# EAGLE board FIFO+Expander-Rev2 (EAGLE 9.6.2)
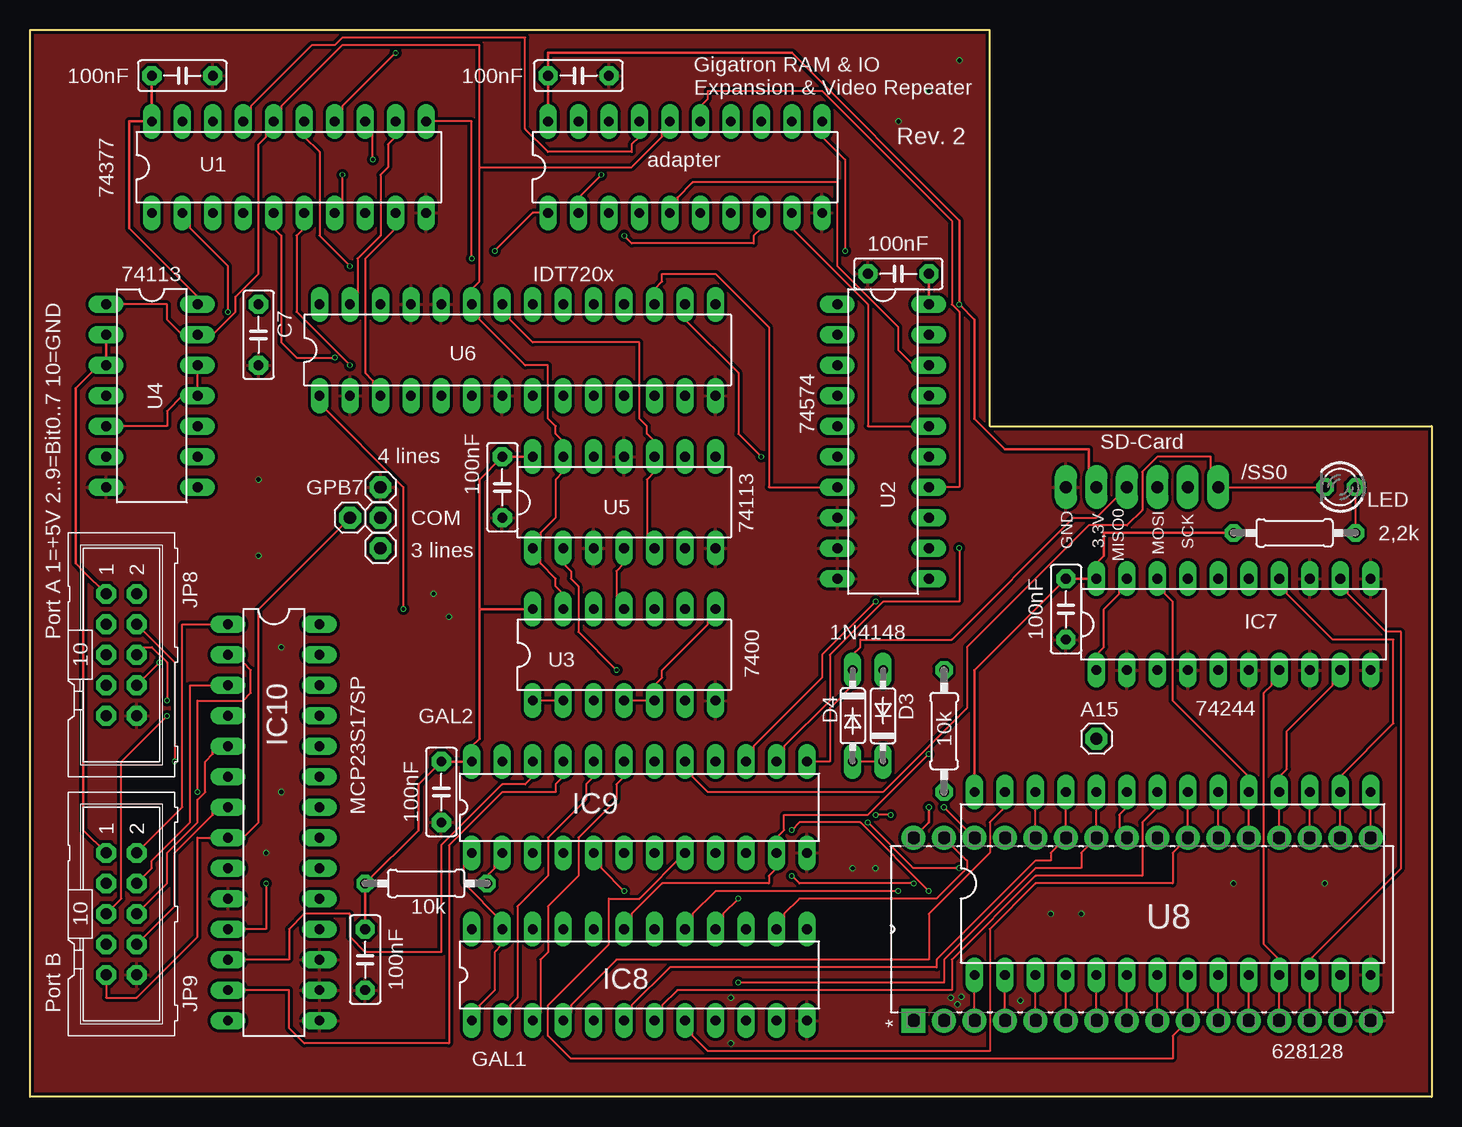
[diagram p0: board, top side]
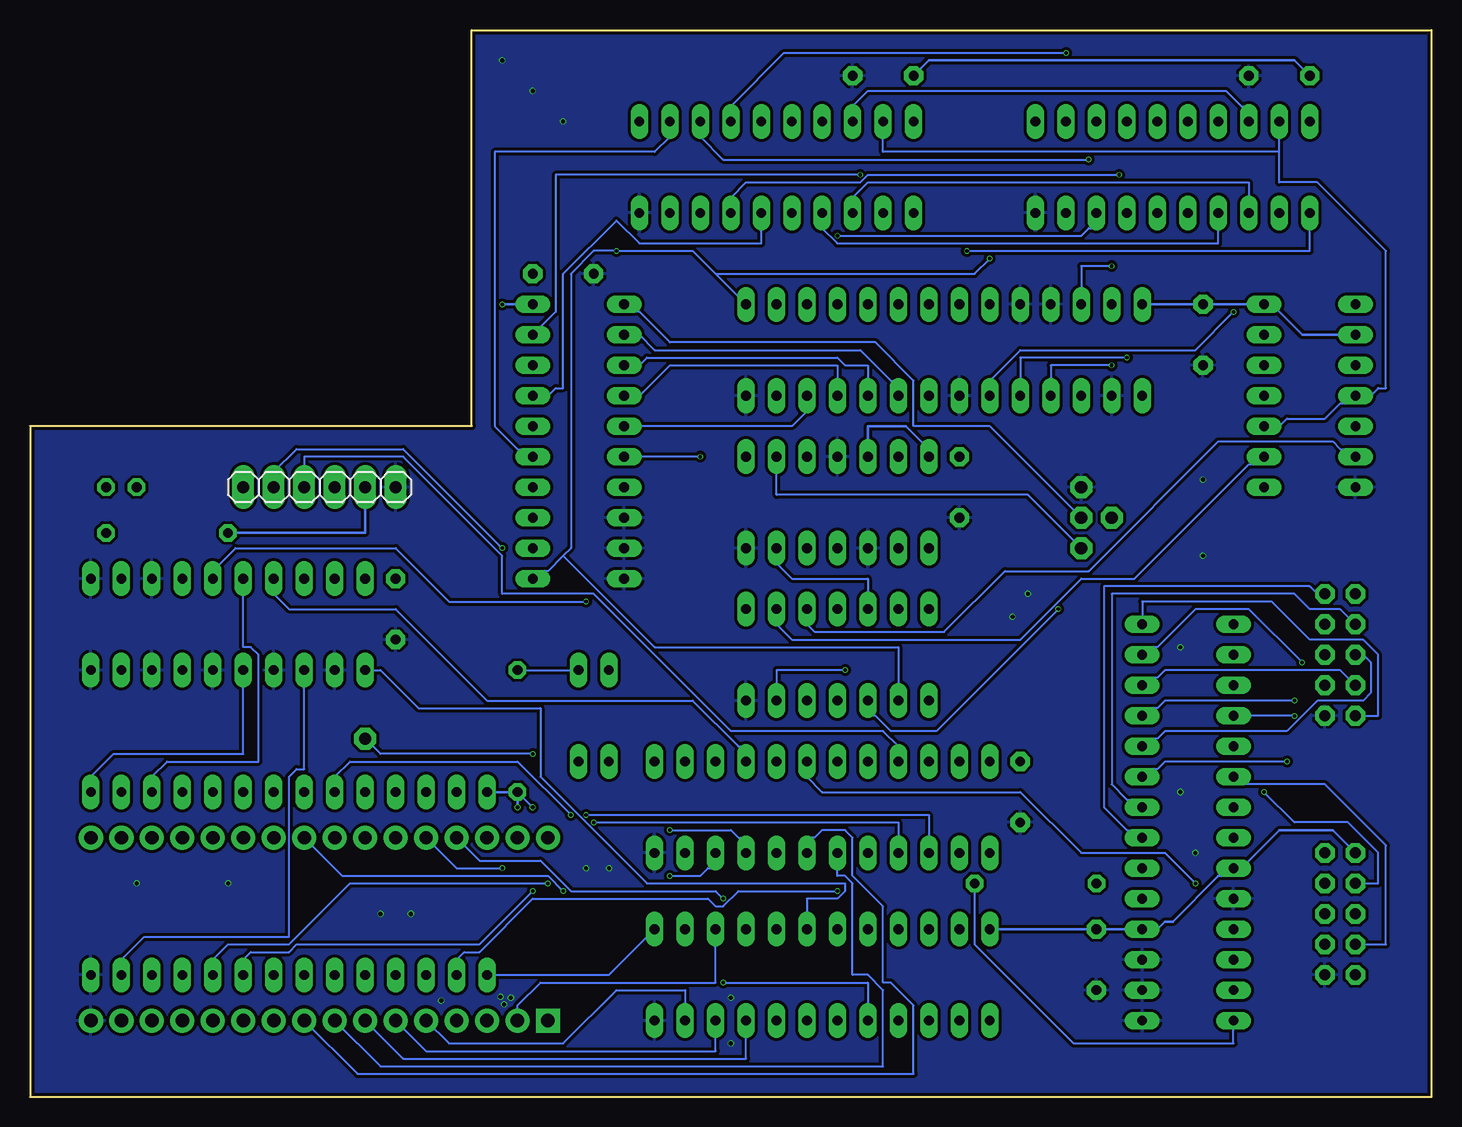
[diagram p1: board, bottom side, seen from below]

Size 116.84 x 88.9 mm. Coordinates in mm from the lower left corner, seen from the top.
Outline: 80.01,55.88 116.84,55.88 116.84,0 0,0 0,88.9 80.01,88.9 80.01,55.88
Copper layers (1*16): Top 0.035mm / dielectric 1.6mm / Bottom 0.035mm
Design rules "jlcpcb-2layers": minimum track width 5mil, minimum drill 0.3mm, track to track 5mil, track to pad 5mil, pad to pad 5mil, via to via 5mil, smd to smd 5mil, copper to edge 0.2mm, drill to drill 6mil, minimum pad ring 10mil, minimum via ring 3mil, stop-mask expansion 4mil, vias tented up to drill 0mil, thermal gap 10mil
Net classes: 0 default: width 0.152 mm, drill 0.127 mm, clearance 0.127 mm; 1 power: width 0.203 mm, drill 0.127 mm, clearance 0.127 mm

## Footprints (pad centres in the part's own frame; a part is rotated, then mirrored left to right if it is on the bottom)
1X01 = drill 1.016 octagon: 1 0,0
C5B2.5 = drill 0.813 pad 1.6 octagon: 1 -2.54,0; 2 2.54,0
DIL20 = drill 0.813 long: 1 -11.43,-3.81; 2 -8.89,-3.81; 3 -6.35,-3.81; 4 -3.81,-3.81; 5 -1.27,-3.81; 6 1.27,-3.81; 7 3.81,-3.81; 8 6.35,-3.81; 9 8.89,-3.81; 10 11.43,-3.81; 11 11.43,3.81; 12 8.89,3.81; 13 6.35,3.81; 14 3.81,3.81; 15 1.27,3.81; 16 -1.27,3.81; 17 -3.81,3.81; 18 -6.35,3.81; 19 -8.89,3.81; 20 -11.43,3.81
DO35-7 = drill 0.813 long: A 3.81,0; C -3.81,0
DIL28-6 = drill 0.813 long: 1 -16.51,-7.62; 2 -13.97,-7.62; 3 -11.43,-7.62; 4 -8.89,-7.62; 5 -6.35,-7.62; 6 -3.81,-7.62; 7 -1.27,-7.62; 8 1.27,-7.62; 9 3.81,-7.62; 10 6.35,-7.62; 11 8.89,-7.62; 12 11.43,-7.62; 13 13.97,-7.62; 14 16.51,-7.62; 15 16.51,7.62; 16 13.97,7.62; 17 11.43,7.62; 18 8.89,7.62; 19 6.35,7.62; 20 3.81,7.62; 21 1.27,7.62; 22 -1.27,7.62; 23 -3.81,7.62; 24 -6.35,7.62; 25 -8.89,7.62; 26 -11.43,7.62; 27 -13.97,7.62; 28 -16.51,7.62
DIL24-3 = drill 0.813 long: 1 -13.97,-3.81; 2 -11.43,-3.81; 3 -8.89,-3.81; 4 -6.35,-3.81; 5 -3.81,-3.81; 6 -1.27,-3.81; 7 1.27,-3.81; 8 3.81,-3.81; 9 6.35,-3.81; 10 8.89,-3.81; 11 11.43,-3.81; 12 13.97,-3.81; 13 13.97,3.81; 14 11.43,3.81; 15 8.89,3.81; 16 6.35,3.81; 17 3.81,3.81; 18 1.27,3.81; 19 -1.27,3.81; 20 -3.81,3.81; 21 -6.35,3.81; 22 -8.89,3.81; 23 -11.43,3.81; 24 -13.97,3.81
DIL28-3 = drill 0.813 long: 1 -16.51,-3.81; 2 -13.97,-3.81; 3 -11.43,-3.81; 4 -8.89,-3.81; 5 -6.35,-3.81; 6 -3.81,-3.81; 7 -1.27,-3.81; 8 1.27,-3.81; 9 3.81,-3.81; 10 6.35,-3.81; 11 8.89,-3.81; 12 11.43,-3.81; 13 13.97,-3.81; 14 16.51,-3.81; 15 16.51,3.81; 16 13.97,3.81; 17 11.43,3.81; 18 8.89,3.81; 19 6.35,3.81; 20 3.81,3.81; 21 1.27,3.81; 22 -1.27,3.81; 23 -3.81,3.81; 24 -6.35,3.81; 25 -8.89,3.81; 26 -11.43,3.81; 27 -13.97,3.81; 28 -16.51,3.81
ML10 = drill 0.914 octagon: 1 -5.08,-1.27; 2 -5.08,1.27; 3 -2.54,-1.27; 4 -2.54,1.27; 5 0,-1.27; 6 0,1.27; 7 2.54,-1.27; 8 2.54,1.27; 9 5.08,-1.27; 10 5.08,1.27
1X06 = drill 1.016 long: 1 -6.35,0; 2 -3.81,0; 3 -1.27,0; 4 1.27,0; 5 3.81,0; 6 6.35,0
LED3MM = drill 0.813 octagon: A -1.27,0; K 1.27,0
0207/10 = drill 0.813 octagon: 1 -5.08,0; 2 5.08,0
DIL14 = drill 0.813 long: 1 -7.62,-3.81; 2 -5.08,-3.81; 3 -2.54,-3.81; 4 0,-3.81; 5 2.54,-3.81; 6 5.08,-3.81; 7 7.62,-3.81; 8 7.62,3.81; 9 5.08,3.81; 10 2.54,3.81; 11 0,3.81; 12 -2.54,3.81; 13 -5.08,3.81; 14 -7.62,3.81
DIP254P1524X393-32 = drill 1.118 square: 1 -15.24,38.1 | drill 1.118: 2 -15.24,35.56; 3 -15.24,33.02; 4 -15.24,30.48; 5 -15.24,27.94; 6 -15.24,25.4; 7 -15.24,22.86; 8 -15.24,20.32; 9 -15.24,17.78; 10 -15.24,15.24; 11 -15.24,12.7; 12 -15.24,10.16; 13 -15.24,7.62; 14 -15.24,5.08; 15 -15.24,2.54; 16 -15.24,0; 17 0,0; 18 0,2.54; 19 0,5.08; 20 0,7.62; 21 0,10.16; 22 0,12.7; 23 0,15.24; 24 0,17.78; 25 0,20.32; 26 0,22.86; 27 0,25.4; 28 0,27.94; 29 0,30.48; 30 0,33.02; 31 0,35.56; 32 0,38.1

## Placement (x,y rotation side)
3LINES  [1X01]  29.21,45.72 0 top
4LINES  [1X01]  29.21,50.8 0 top
100NF  100nF  [C5B2.5]  27.94,11.43 270 top
A15  A15  [1X01]  88.9,29.84 0 top
ADAPTER  Adapter74377N  [DIL20]  54.61,77.47 0 top
C1  100nF  [C5B2.5]  39.37,50.8 270 top
C2  100nF  [C5B2.5]  72.39,68.58 180 top
C3  100nF  [C5B2.5]  86.36,40.64 270 top
C4  100nF  [C5B2.5]  12.7,85.09 0 top
C5  100nF  [C5B2.5]  45.72,85.09 0 top
C7  100nF  [C5B2.5]  19.05,63.5 270 top
C8  100nF  [C5B2.5]  34.29,25.4 270 top
COMON  [1X01]  29.21,48.26 0 top
D3  1N4148  [DO35-7]  71.12,31.75 90 top
D4  1N4148  [DO35-7]  68.58,31.75 270 top
IC6  RAM-Adapter  [DIL28-6]  95.25,17.78 0 top
IC7  74HCT244N  [DIL20]  100.33,39.37 0 top
IC8  GAL1  [DIL24-3]  50.8,10.16 0 top
IC9  GAL2  [DIL24-3]  50.8,24.13 0 top
IC10  MCP23S17SP  [DIL28-3]  20.32,22.86 270 top
JP8  GPA  [ML10]  7.62,36.83 270 top
JP9  GPB  [ML10]  7.62,15.24 270 top
JP10  SD  [1X06]  92.71,50.8 0 bottom
JP11  GMOD  [1X01]  26.67,48.26 0 top
LED  3mm  [LED3MM]  109.22,50.8 180 top
R4  10k  [0207/10]  76.2,30.48 270 top
R5  2,2k  [0207/10]  105.41,46.99 180 top
R6  10k  [0207/10]  33.02,17.78 180 top
U1  74377N  [DIL20]  21.59,77.47 0 top
U2  74574N  [DIL20]  71.12,54.61 270 top
U3  74LS00N  [DIL14]  49.53,36.83 0 top
U4  74113N  [DIL14]  10.16,58.42 270 top
U5  74113N  [DIL14]  49.53,49.53 0 top
U6  IDT7204L-15  [DIL28-3]  40.64,62.23 0 top
U8  AS6C1008-55PCN  [DIP254P1524X393-32]  111.76,21.59 90 top

## Library data of the parts
3LINES 4LINES A15 COMON JP10 JP11 = pinhead
100NF C1-C5 C7 C8 = capacitor-wima
ADAPTER U1-U5 = 74ttl-din
D3 D4 = diode
IC6 = memory-hitachi; OC_FARNELL: unknown; OC_NEWARK: unknown
IC7 = 74xx-eu
IC8 IC9 = pal; MPN: GAL22V10D-7LPN; OC_FARNELL: 1571925; OC_NEWARK: 97M0480
IC10 = microchip; MF: MICROCHIP; MPN: MCP23S17-E/SP; OC_FARNELL: 1292238; OC_NEWARK: 31K2951
JP8 JP9 = con-ml; OC_FARNELL: unknown; OC_NEWARK: unknown
LED = led
R4-R6 = rcl; SPICEPREFIX: R
U6 = memory-idt
U8 = Alliance_Memory_By_element14_Batch_1; MPN: AS6C1008-55PCN; OC_FARNELL: 1562896; OC_NEWARK: 94M6214; PACKAGE: DIP-32; SUPPLIER: ALLIANCE MEMORY

## Nets
/CS1: IC6.20 U8.22
/E377: ADAPTER.1 U1.1
/HSYNC: ADAPTER.16 U1.16 U3.13 U4.1 U4.13 U5.1 U5.13 U6.23
/OE: IC6.22 IC8.7
/OEPORT: IC7.1 IC7.19 IC8.18
/OERAM: IC8.17 U8.24
/SS0: IC9.17 JP10.1 LED.K
/SS1: IC9.18 IC10.11
/VSYNC: ADAPTER.19 U1.19 U4.4 U4.10
/WE: IC6.27 IC8.4
/WERAM: IC8.16 U8.29
/ZPBANK: IC8.20
A0: IC6.10 IC9.10 U8.12
A1: IC6.9 IC9.9 U8.11
A2: IC6.8 IC9.8 U8.10
A3: IC6.7 IC9.7 U8.9
A4: IC6.6 IC9.6 U8.8
A5: IC6.5 IC8.9 U8.7
A6: IC6.4 IC8.10 U8.6
A7: IC6.3 IC8.11 U8.5
A8: IC6.25 IC8.6 U8.27
A9: IC6.24 IC8.5 U8.26
A10: IC6.21 IC8.8 U8.23
A11: IC6.23 IC9.3 U8.25
A12: IC6.2 IC9.5 U8.4
A13: IC6.26 IC9.4 U8.28
A14: IC6.1 IC8.13 U8.3
A15: A15.1 IC8.19 IC9.11
A15R: IC8.15 U8.2
A16R: IC8.14 U8.31
B0: IC8.22
B1: IC8.21
BH: U1.15 U6.26
BL: U1.12 U6.27
BUS0: IC6.11 IC7.7 U8.13
BUS1: IC6.12 IC7.12 U8.14
BUS2: IC6.13 IC7.3 U8.15
BUS3: IC6.15 IC7.5 U8.17
BUS4: IC6.16 IC7.14 U8.18
BUS5: IC6.17 IC7.16 U8.19
BUS6: IC6.18 IC7.9 U8.20
BUS7: IC6.19 IC7.18 U8.21
CLK377: ADAPTER.11 U1.11 U2.11 U3.1 U3.2 U6.15
CTRLCLK: IC8.1 IC8.23 IC9.1
D0: ADAPTER.3 U1.3
D1: ADAPTER.4 U1.4
D2: ADAPTER.7 U1.7
D3: ADAPTER.8 U1.8
D4: ADAPTER.13 U1.13
D5: ADAPTER.14 U1.14
D6: ADAPTER.17 U1.17
D7: ADAPTER.18 U1.18
F0: U2.2 U6.9
F1: U2.3 U6.10
F2: U2.4 U6.11
F3: U2.5 U6.12
F4: U2.6 U6.16
F5: U2.7 U6.17
GH: U1.9 U6.3
GL: U1.6 U6.4
GND [power]: 4LINES.1 100NF.2 ADAPTER.10 C1.2 C2.2 C3.2 C4.2 C5.2 C7.2 C8.2 IC6.14 IC7.2 IC7.4 IC7.6 IC7.8 IC7.10 IC7.11 IC7.13 IC8.12 IC9.12 IC10.10 IC10.15 IC10.16 IC10.17 JP8.10 JP9.10 JP10.6 U1.10 U2.8 U2.9 U2.10 U3.7 U4.7 U5.3 U5.7 U5.11 U6.2 U6.7 U6.14 U6.24 U6.25 U8.16
GPA0: IC10.21 JP8.2
GPA1: IC10.22 JP8.3
GPA2: IC10.23 JP8.4
GPA3: IC10.24 JP8.5
GPA4: IC10.25 JP8.6
GPA5: IC10.26 JP8.7
GPA6: IC10.27 JP8.8
GPA7: IC10.28 JP8.9
GPB0: IC10.1 JP9.2
GPB1: IC10.2 JP9.3
GPB2: IC10.3 JP9.4
GPB3: IC10.4 JP9.5
GPB4: IC10.5 JP9.6
GPB5: IC10.6 JP9.7
GPB6: IC10.7 JP9.8
GPB7: IC10.8 JP9.9 JP11.1
GTG0: IC8.3 IC9.19
GTG1: IC8.2 IC9.20
MISO0: D4.C IC9.13 JP10.4
MISO1: IC9.2 IC10.14 R6.1
MOSI: IC9.21 IC10.13 JP10.3
N$1: U4.5 U4.11 U4.12
N$2: U3.3 U6.1
N$3: U3.10 U4.6
N$4: U3.9 U4.9
N$5: D3.C D4.A
N$6: U3.4 U3.5 U3.8
N$7: U3.6 U5.2
N$8: U3.11 U5.4
N$9: U3.12 U5.6
N$10: 3LINES.1 U5.9
N$11: COMON.1 U2.1
N$12: U5.5 U5.10 U6.22
N$13: LED.A R5.1
N$14: D3.A R4.1
PORT2: IC7.17 IC9.16
PORT3: IC7.15 IC9.15
Q0: ADAPTER.2 U2.19
Q1: ADAPTER.5 U2.18
Q2: ADAPTER.6 U2.17
Q3: ADAPTER.9 U2.16
Q4: ADAPTER.12 U2.15
Q5: ADAPTER.15 U2.14
RH: U1.5 U6.5
RL: U1.2 U6.6
SCK: IC9.22 IC10.12
SCK0: IC9.14 JP10.2
SCLK: IC9.23
VCC [power]: 100NF.1 ADAPTER.20 C1.1 C2.1 C3.1 C4.1 C5.1 C7.1 C8.1 IC6.28 IC7.20 IC8.24 IC9.24 IC10.9 IC10.18 JP8.1 JP9.1 JP10.5 R4.2 R5.2 R6.2 U1.20 U2.20 U3.14 U4.2 U4.3 U4.14 U5.12 U5.14 U6.28 U8.30 U8.32

## Tracks (layer width: path | path; a pad name or v marks a point on that pad's centre or on a via)
/CS1
  Top 0.152: U8.22 IC6.20
/E377  (via drill 0.3)
  Top 0.152: v38.73,70.48 41.91,73.66 ADAPTER.1
  Bottom 0.152: U1.1 10.16,70.48 v38.73,70.48
/HSYNC
  Top 0.152: U4.1 11.43,66.04 11.43,64.77 12.7,63.5 U4.13 15.24,63.5 17.14,65.41 17.14,66.67 19.05,68.58 19.05,79.38 19.69,80.01 19.69,80.65 U1.16 20.95,81.91 20.95,82.55 26.03,87.63 37.47,87.63 37.47,77.47 | U3.13 44.45,41.91 43.81,42.55 43.81,43.18 42.55,44.45 42.55,45.08 U5.1 42.55,46.35 42.55,46.99 43.81,48.26 43.81,51.44 44.45,52.07 U5.13 44.45,54.61 43.81,55.24 43.81,55.88 43.18,56.52 43.18,60.96 41.28,60.96 37.47,64.77 37.47,65.41 U6.23 36.83,67.31 37.47,67.94 37.47,77.47 | ADAPTER.16 52.71,80.65 52.71,80.01 50.17,77.47 37.47,77.47
/OE
  Top 0.152: IC8.7 52.71,6.98 52.71,7.62 53.97,8.89 76.84,8.89 76.84,11.43 83.82,18.41 92.71,18.41 92.71,22.86 93.98,24.13 IC6.22
/OEPORT
  Top 0.152: IC7.19 90.81,42.55 90.81,41.91 89.53,40.64 89.53,37.47 88.9,36.83 IC7.1
  Bottom 0.152: IC8.18 52.07,16.51 49.53,16.51 48.89,17.14 48.89,17.78 65.41,17.78 74.29,26.67 74.29,32.38 84.46,32.38 87.63,35.56 IC7.1
/OERAM  (via drill 0.3)
  Top 0.152: IC8.17 55.25,14.6 55.25,15.24 57.15,17.14 v72.39,17.14
  Bottom 0.152: v72.39,17.14 73.66,18.41 90.81,18.41 U8.24
/SS0
  Top 0.152: IC9.17 55.25,27.3 55.25,26.67 56.52,25.4 71.12,25.4 78.1,32.38 78.1,37.47 88.27,47.62 91.44,47.62 92.71,48.89 92.71,52.07 93.98,53.34 98.43,53.34 98.43,51.44 JP10.1 LED.K
/SS1  (via drill 0.3)
  Top 0.152: IC10.11 19.69,13.97 v19.69,17.78
  Bottom 0.152: v19.69,17.78 22.22,20.32 29.21,20.32 34.29,25.4 50.8,25.4 52.07,26.67 IC9.18
/VSYNC
  Bottom 0.152: U4.10 12.7,55.88 12.06,56.52 8.89,56.52 7.62,57.78 6.98,57.78 U4.4 5.08,58.42 4.45,59.05 3.81,59.05 3.81,70.48 9.53,76.2 12.7,76.2 12.7,78.74 | 12.7,78.74 U1.19 | ADAPTER.19 45.72,78.74 12.7,78.74
/WE
  Top 0.152: IC8.4 45.09,6.98 45.09,7.62 48.89,11.43 74.93,11.43 74.93,15.24 80.01,20.32 80.01,22.86 81.28,24.13 IC6.27
/WERAM  (via drill 0.3)
  Top 0.152: IC8.16 57.78,14.6 57.78,15.24 v59.06,16.51
  Bottom 0.152: v59.06,16.51 59.69,17.14 71.75,17.14 74.29,19.69 79.38,19.69 U8.29
A0  (via drill 0.3)
  Top 0.152: U8.12 IC6.10 | v63.5,18.41 64.13,17.78 v73.66,17.78
  Bottom 0.152: IC9.10 59.69,19.05 60.32,19.05 60.96,18.41 v63.5,18.41 | v73.66,17.78 90.17,17.78 95.25,12.7 100.33,12.7 101.6,11.43 IC6.10
A1  (via drill 0.3)
  Top 0.152: U8.11 IC6.9 | v63.5,22.22 64.13,22.86 69.22,22.86 v74.93,17.14
  Bottom 0.152: IC9.9 57.15,21.59 57.78,21.59 58.42,22.22 v63.5,22.22 | v74.93,17.14 79.38,12.7 94.62,12.7 95.25,12.06 98.43,12.06 99.06,11.43 IC6.9
A2
  Top 0.152: IC6.8 U8.10 95.25,5.08 95.25,3.17 45.09,3.17 43.18,5.08 43.18,7.62 48.26,12.7 48.26,16.51 50.8,16.51 IC9.8
A3
  Top 0.152: U8.9 IC6.7
  Bottom 0.152: IC9.7 52.07,21.59 51.44,21.59 50.8,22.22 48.89,22.22 48.26,21.59 48.26,18.41 45.72,15.88 45.72,9.52 45.09,9.52 43.18,7.62 43.18,1.9 89.53,1.9 U8.9
A4
  Top 0.152: U8.8 IC6.6
  Bottom 0.152: IC9.6 49.53,18.41 48.89,18.41 48.26,17.78 48.26,10.16 46.99,10.16 45.72,8.89 45.72,2.54 87.63,2.54 U8.8
A5
  Top 0.152: U8.7 IC6.5
  Bottom 0.152: IC8.9 57.15,3.17 85.72,3.17 U8.7
A6
  Top 0.152: U8.6 IC6.4
  Bottom 0.152: IC8.10 59.69,3.81 83.82,3.81 U8.6
A7
  Top 0.152: U8.5 IC6.3
  Bottom 0.152: IC8.11 62.23,8.89 67.94,8.89 72.39,4.44 81.91,4.44 U8.5
A8
  Top 0.152: IC8.6 50.17,6.98 50.17,7.62 53.34,10.8 75.56,10.8 75.56,11.43 83.82,19.69 85.09,19.69 85.09,20.32 U8.27 IC6.25
A9  (via drill 0.3)
  Top 0.152: v59.06,9.52 76.2,9.52 76.2,11.43 83.82,19.05 87.63,19.05 87.63,20.32 U8.26 IC6.24
  Bottom 0.152: IC8.5 46.99,9.52 v59.06,9.52
A10
  Top 0.152: IC8.8 55.25,5.71 55.25,5.08 56.52,3.81 80.01,3.81 80.01,13.97 83.82,17.78 95.25,17.78 95.25,20.32 U8.23 IC6.21
A11  (via drill 0.3)
  Top 0.152: v71.75,23.49 v70.49,23.49 | U8.25 90.81,22.22 90.81,23.49 91.44,24.13 IC6.23
  Bottom 0.152: IC9.3 41.91,23.49 v70.49,23.49 | v71.75,23.49 76.2,27.94 90.17,27.94 91.44,26.67 IC6.23
A12  (via drill 0.3)
  Top 0.152: U8.4 IC6.2 | IC9.5 47.62,19.69 47.62,19.05 v49.53,17.14
  Bottom 0.152: v49.53,17.14 57.78,17.14 59.06,15.88 59.69,15.88 60.32,16.51 74.93,16.51 79.38,12.06 80.65,12.06 81.28,11.43 IC6.2
A13  (via drill 0.3)
  Top 0.152: v69.85,22.86 73.66,19.05 v77.47,19.05 | U8.28 IC6.26
  Bottom 0.152: IC9.4 44.45,22.86 v69.85,22.86 | v77.47,19.05 81.28,19.05 U8.28
A14
  Top 0.152: U8.3 IC6.1
  Bottom 0.152: IC8.13 68.58,10.16 IC6.1
A15  (via drill 0.3)
  Top 0.152: IC8.19 50.17,14.6 50.17,15.24 52.71,17.78 61.59,17.78 61.59,18.41 62.23,19.05 IC9.11 62.23,21.59 62.87,22.22 62.87,23.49 69.85,23.49 v74.93,28.58
  Bottom 0.152: A15.1 87.63,28.58 v74.93,28.58
A15R
  Bottom 0.152: IC8.15 59.69,9.52 74.29,9.52 76.2,7.62 U8.2
A16R
  Top 0.152: IC8.14 62.87,14.6 62.87,15.24 64.13,16.51 75.56,16.51 78.1,19.05 78.1,19.69 U8.31
BH  (via drill 0.3)
  Top 0.152: v26.67,69.22 24.13,71.75 24.13,78.74 22.86,80.01 U1.15
  Bottom 0.152: U6.26 29.21,69.22 v26.67,69.22
BL
  Top 0.152: U6.27 27.31,66.67 27.31,69.85 29.21,71.75 29.21,76.84 29.84,77.47 29.84,79.38 30.48,80.01 U1.12
BUS0
  Top 0.152: U8.13 IC6.11 104.14,11.43 102.87,12.7 102.87,33.66 103.5,34.29 103.5,34.92 IC7.7
BUS1
  Top 0.152: U8.14 IC6.12 106.68,11.43 114.3,19.05 114.3,38.73 113.03,38.73 109.85,41.91 109.85,42.55 IC7.12
BUS2
  Top 0.152: U8.15 IC6.13
  Bottom 0.152: IC7.3 93.98,27.3 94.62,27.3 95.25,26.67 95.25,13.33 107.31,13.33 109.22,11.43 IC6.13
BUS3
  Top 0.152: U8.17 IC6.15
  Bottom 0.152: IC7.5 99.06,28.58 109.85,28.58 111.76,26.67 IC6.15
BUS4
  Top 0.152: U8.18 IC6.16 109.22,26.67 113.66,31.11 113.66,38.1 108.59,38.1 104.78,41.91 104.78,42.55 IC7.14
BUS5
  Top 0.152: U8.19 IC6.17
  Bottom 0.152: IC7.16 99.06,37.47 98.43,37.47 97.79,36.83 97.79,27.94 105.41,27.94 106.68,26.67 IC6.17
BUS6
  Top 0.152: U8.20 IC6.18 104.14,26.67 104.78,27.3 104.78,30.48 108.59,34.29 108.59,34.92 IC7.9
BUS7
  Top 0.152: U8.21 IC6.19 101.6,26.67 95.25,33.02 95.25,41.27 94.62,41.91 94.62,42.55 IC7.18
CLK377  (via drill 0.3)
  Top 0.152: U3.2 U3.1 | v67.94,70.48 67.94,78.1 66.04,80.01 ADAPTER.11 | U1.11 36.83,81.28 v36.83,69.85
  Bottom 0.152: 59.69,68.58 61.59,70.48 v67.94,70.48 69.85,70.48 71.75,68.58 71.75,45.72 72.39,45.08 | 59.69,68.58 U6.15 | v36.83,69.85 38.1,68.58 59.69,68.58 | U2.11 74.29,43.81 73.66,43.81 72.39,45.08 | U3.2 44.45,37.47 64.77,37.47 72.39,45.08
CTRLCLK
  Top 0.152: IC8.1 37.47,6.98 37.47,7.62 38.73,8.89 38.73,12.06 39.37,12.7 IC8.23 39.37,14.6 36.2,17.78 36.2,19.69 IC9.1
D0
  Bottom 0.152: U1.3 15.24,76.2 46.99,76.2 48.26,74.93 ADAPTER.3
D1
  Bottom 0.152: U1.4 17.78,71.12 49.53,71.12 50.8,72.39 ADAPTER.4
D2  (via drill 0.3)
  Top 0.152: U1.7 26.03,74.3 v26.03,76.84
  Bottom 0.152: v26.03,76.84 46.99,76.84 47.62,76.2 57.15,76.2 58.42,74.93 ADAPTER.7
D3  (via drill 0.3)
  Top 0.152: v49.53,71.75 50.17,71.12 60.32,71.12 60.32,71.75 60.96,72.39 ADAPTER.8
  Bottom 0.152: U1.8 27.94,72.39 28.58,72.39 29.21,71.75 v49.53,71.75
D4  (via drill 0.3)
  Top 0.152: U1.13 28.58,80.65 v28.58,78.1
  Bottom 0.152: v28.58,78.1 59.06,78.1 60.96,80.01 ADAPTER.13
D5  (via drill 0.3)
  Top 0.152: U1.14 26.03,81.91 26.03,82.55 v30.48,87
  Bottom 0.152: v30.48,87 53.97,87 58.42,82.55 ADAPTER.14
D6
  Top 0.152: U1.17 18.42,81.91 18.42,82.55 23.5,87.63 25.4,87.63 26.03,88.26 41.28,88.26 41.28,80.65 43.18,78.74 50.17,78.74 50.17,79.38 50.8,80.01 ADAPTER.17
D7
  Bottom 0.152: U1.18 15.24,82.55 15.88,82.55 17.14,83.82 46.99,83.82 48.26,82.55 ADAPTER.18
F0
  Bottom 0.152: U6.9 44.45,59.69 45.09,59.69 47.62,62.23 64.77,62.23 66.04,63.5 U2.2
F1
  Bottom 0.152: U6.10 46.99,60.96 48.89,60.96 49.53,61.59 65.41,61.59 66.04,60.96 U2.3
F2
  Bottom 0.152: U6.11 49.53,60.96 63.5,60.96 66.04,58.42 U2.4
F3
  Bottom 0.152: U2.5 53.34,55.88 52.07,57.15 U6.12
F4  (via drill 0.3)
  Top 0.152: v60.96,53.34 59.06,55.24 59.06,60.33 54.61,64.77 U6.16
  Bottom 0.152: v60.96,53.34 U2.6
F5
  Top 0.152: U2.7 61.59,50.8 61.59,64.13 57.15,68.58 52.71,68.58 52.71,67.94 52.07,67.31 U6.17
GH
  Top 0.152: U6.3 28.58,59.05 28.58,59.69 27.94,60.33 27.94,69.85 30.48,72.39 U1.9
GL  (via drill 0.3)
  Top 0.152: v26.67,60.96 22.22,65.41 22.22,71.75 22.86,72.39 U1.6
  Bottom 0.152: U6.4 31.75,60.96 v26.67,60.96
GND  (via drill 0.35)
  other vias: 77.47,86.36 74.93,83.82 72.39,81.28 107.95,17.78 100.33,17.78 87.63,15.24 85.09,15.24 19.05,51.44 19.05,45.08 33.66,41.91 34.92,40 19.69,20.32 20.95,25.4 20.95,37.47 70.49,19.05 68.58,19.05 58.42,4.44 77.63,8.33 82.55,8.02 76.76,8.25 77.31,7.7 58.42,8.25
  pour Bottom (isolate 0.254): 0,0 0,88.9 80.01,88.9 80.01,55.88 116.84,55.88 116.84,0
  pour Top (isolate 0.254): 0,0 0,88.9 80.01,88.9 80.01,55.88 116.84,55.88 116.84,0
GPA0
  Bottom 0.152: IC10.21 24.77,22.22 25.4,22.22 27.31,24.13 27.31,42.55 10.16,42.55 9.53,41.91 JP8.2
GPA1
  Bottom 0.152: IC10.22 24.77,24.77 25.4,24.77 26.67,26.03 26.67,41.91 11.43,41.91 10.16,40.64 7.62,40.64 JP8.3
GPA2  (via drill 0.3)
  Top 0.152: v12.06,27.94 12.06,36.19 JP8.4
  Bottom 0.152: IC10.23 23.5,27.3 22.86,27.3 22.22,27.94 v12.06,27.94
GPA3
  Bottom 0.152: IC10.24 23.5,29.84 22.86,29.84 22.22,30.48 12.06,30.48 9.53,33.02 5.72,33.02 5.08,33.66 5.08,36.19 5.72,36.83 JP8.5
GPA4  (via drill 0.3)
  Top 0.152: v11.43,33.02 11.43,36.19 10.16,37.47 8.89,37.47 JP8.6
  Bottom 0.152: IC10.25 23.5,32.38 22.86,32.38 22.22,33.02 v11.43,33.02
GPA5
  Bottom 0.152: IC10.26 23.5,34.92 22.86,34.92 22.22,35.56 7.62,35.56 JP8.7
GPA6  (via drill 0.3)
  Top 0.152: JP8.8 v10.8,36.19
  Bottom 0.152: IC10.27 23.5,37.47 22.86,37.47 19.69,40.64 15.24,40.64 v10.8,36.19
GPA7
  Bottom 0.152: IC10.28 24.13,41.27 13.34,41.27 10.16,38.1 5.72,38.1 4.45,36.83 4.45,31.75 JP8.9
GPB0
  Top 0.152: IC10.1 12.7,39.37 12.7,24.13 JP9.2
GPB1  (via drill 0.3)
  Top 0.152: IC10.2 17.78,36.83 17.78,36.19 18.42,35.56 18.42,33.66 17.78,33.02 13.97,33.02 v13.97,25.4
  Bottom 0.152: v13.97,25.4 11.43,22.86 6.98,22.86 4.45,20.32 4.45,17.78 JP9.3
GPB2
  Top 0.152: IC10.3 13.34,34.29 13.34,22.86 10.16,19.69 10.16,19.05 JP9.4
GPB3  (via drill 0.3)
  Top 0.152: v11.43,31.75 7.62,27.94 7.62,16.51 JP9.5
  Bottom 0.152: v11.43,31.75 IC10.4
GPB4
  Top 0.152: IC10.5 15.24,29.21 15.24,28.58 14.61,27.94 14.61,25.4 13.97,24.77 13.97,22.86 11.43,20.32 11.43,17.78 JP9.6
GPB5
  Bottom 0.152: IC10.6 15.88,26.03 8.89,26.03 3.81,20.95 3.81,12.7 JP9.7
GPB6
  Top 0.152: IC10.7 15.24,24.13 15.24,23.49 12.06,20.32 12.06,15.88 JP9.8
GPB7
  Top 0.152: JP9.9 6.35,8.25 8.89,8.25 13.97,13.33 13.97,21.59 IC10.8 17.78,21.59 19.05,22.86 19.05,40.64 JP11.1
GTG0
  Top 0.152: IC8.3 42.55,6.98 42.55,11.43 43.18,12.06 43.18,15.88 45.72,18.41 45.72,21.59 48.89,24.77 48.89,26.03 49.53,26.67 IC9.19
GTG1
  Top 0.152: IC8.2 40,6.98 40,7.62 40.64,8.25 40.64,15.88 43.18,18.41 43.18,21.59 46.36,24.77 46.36,26.03 46.99,26.67 IC9.20
MISO0
  Top 0.152: IC9.13 66.68,27.94 66.68,32.38 68.58,34.29 D4.C 68.58,36.83 69.22,37.47 69.22,38.1 76.84,38.1 87,48.26 88.9,48.26 JP10.4
MISO1
  Top 0.152: IC9.2 38.73,19.69 38.73,19.05 38.1,18.41 R6.1
  Bottom 0.152: IC10.14 16.51,4.44 29.84,4.44 38.1,12.7 R6.1
MOSI
  Top 0.152: IC10.13 21.59,8.89 21.59,5.71 22.86,4.44 34.92,4.44 34.92,20.95 39.37,25.4 43.81,25.4 43.81,26.03 44.45,26.67 IC9.21
  Bottom 0.152: JP10.3 93.98,53.34 85.72,53.34 77.47,45.08 77.47,41.91 69.85,41.91 58.42,30.48 45.72,30.48 44.45,29.21 IC9.21
N$1
  Top 0.152: U4.5 11.43,55.88 11.43,57.15 12.7,58.42 U4.11 U4.12
N$2  (via drill 0.3)
  Top 0.152: v31.11,40.64 31.11,50.8 24.13,57.78 U6.1
  Bottom 0.152: U3.3 46.99,31.75 46.36,31.75 45.09,30.48 41.28,30.48 v31.11,40.64
N$3
  Bottom 0.152: U4.6 6.98,53.97 7.62,53.97 8.25,54.61 17.78,54.61 28.58,43.81 35.56,43.81 40.64,38.73 51.44,38.73 52.07,39.37 U3.10
N$4
  Bottom 0.152: U4.9 14.61,52.7 15.24,52.7 24.77,43.18 29.21,43.18 34.29,38.1 53.34,38.1 54.61,39.37 U3.9
N$5
  Top 0.152: D3.C D4.A
N$6
  Top 0.152: U3.4 U3.5 52.07,34.29 52.71,34.92 52.71,35.56 56.52,39.37 56.52,40 U3.8
N$7  (via drill 0.3)
  Top 0.152: v48.89,35.56 45.72,38.73 45.72,42.55 45.09,43.18 45.09,43.81 44.45,44.45 U5.2
  Bottom 0.152: U3.6 54.61,35.56 v48.89,35.56
N$8
  Top 0.152: U3.11 48.89,41.27 48.89,43.81 49.53,44.45 U5.4
N$9
  Bottom 0.152: U3.12 46.99,43.18 53.34,43.18 54.61,44.45 U5.6
N$10
  Bottom 0.152: U5.9 54.61,50.16 33.66,50.16 3LINES.1
N$11
  Bottom 0.152: U2.1 66.68,65.41 66.04,65.41 63.5,62.86 46.36,62.86 43.18,59.69 43.18,55.88 36.83,55.88 COMON.1
N$12
  Top 0.152: U5.5 51.44,46.35 51.44,51.44 52.07,52.07 U5.10 52.07,54.61 51.44,55.24 51.44,55.88 50.8,56.52 50.8,62.86 41.91,62.86 40,64.77 40,65.41 U6.22
N$13
  Top 0.152: LED.A R5.1
N$14
  Bottom 0.152: R4.1 D3.A
PORT2
  Bottom 0.152: IC9.16 57.15,29.21 57.78,29.21 61.59,33.02 78.74,33.02 86.36,40.64 95.25,40.64 96.52,41.91 IC7.17
PORT3  (via drill 0.3)
  Top 0.152: IC9.15 60.32,28.58 60.32,29.21 66.04,34.92 66.04,36.83 v70.49,41.27
  Bottom 0.152: v70.49,41.27 81.91,41.27 86.36,45.72 99.69,45.72 101.6,43.81 IC7.15
Q0  (via drill 0.3)
  Top 0.152: v47.62,76.84 45.72,74.93 ADAPTER.2
  Bottom 0.152: U2.19 73.03,65.41 73.03,76.84 v47.62,76.84
Q1
  Top 0.152: ADAPTER.5 53.97,74.3 53.97,74.93 55.25,76.2 67.31,76.2 67.31,69.22 72.39,64.13 72.39,62.23 73.66,60.96 U2.18
Q2
  Bottom 0.152: ADAPTER.6 55.88,71.12 66.04,71.12 67.94,73.02 72.39,68.58 72.39,59.05 73.03,59.05 73.66,58.42 U2.17
Q3
  Top 0.152: U2.16 69.85,55.88 69.85,66.04 63.5,72.39 ADAPTER.9
Q4
  Bottom 0.152: U2.15 75.56,53.97 76.2,53.97 78.1,55.88 78.1,78.74 64.77,78.74 63.5,80.01 ADAPTER.12
Q5
  Top 0.152: U2.14 77.47,50.8 77.47,65.41 76.84,66.04 76.84,73.02 66.04,83.82 56.52,83.82 56.52,83.19 55.88,82.55 ADAPTER.15
RH  (via drill 0.3)
  Top 0.152: v25.4,61.59 22.22,61.59 20.95,62.86 20.95,71.75 20.32,72.39 U1.5
  Bottom 0.152: U6.5 34.29,61.59 v25.4,61.59
RL  (via drill 0.3)
  Top 0.152: U1.2 13.34,73.02 13.34,72.39 16.51,69.22 v16.51,65.41
  Bottom 0.152: v16.51,65.41 19.69,62.23 34.29,62.23 36.83,59.69 U6.6
SCK
  Top 0.152: IC10.12 21.59,11.43 21.59,13.97 22.86,15.24 26.67,15.24 26.67,13.33 27.94,12.06 34.29,12.06 34.29,20.95 39.37,26.03 41.28,26.03 41.91,26.67 IC9.22
SCK0  (via drill 0.3)
  Top 0.152: IC9.14 62.87,28.58 62.87,29.21 66.68,33.02 66.68,36.83 71.12,41.27 77.47,41.27 v77.47,45.72
  Bottom 0.152: v77.47,45.72 85.72,53.97 94.62,53.97 96.52,52.07 JP10.2
VCC  (via drill 0.3, 0.35)
  Top 0.203: 100NF.1 R6.2 32.39,22.22 32.39,26.03 C8.1 IC9.24 36.83,29.21 37.47,29.84 37.47,40.64 | U5.14 C1.1 37.47,51.44 37.47,40.64 | 37.47,40.64 U3.14 | v74.93,24.13 74.93,22.86 U8.32 | v76.2,24.13 U8.30 | C2.1 U2.20 | R5.2 89.53,46.99 89.53,45.08 88.9,44.45 IC7.20 C3.1 78.74,35.56 IC6.28 | JP10.5 88.27,51.44 88.27,53.97 81.28,53.97 78.74,56.52 78.74,64.77 v77.47,66.04 77.47,73.02 63.5,87 43.18,87 C5.1 ADAPTER.20 | U4.2 6.35,61.59 | 4.45,43.81 3.81,44.45 3.81,59.05 6.35,61.59 | 4.45,43.81 JP8.1 | 6.35,61.59 U4.3 | C4.1 U1.20 8.25,81.28 8.25,72.39 13.97,66.67 U4.14 | JP9.1 4.45,22.22 4.45,43.81
  Bottom 0.203: IC8.24 100NF.1 IC10.18 22.86,13.97 22.22,14.6 21.59,14.6 17.78,18.41 17.14,18.41 IC10.9 15.88,19.05 12.7,22.22 8.25,22.22 JP9.1 | U5.12 46.99,55.88 43.81,55.88 41.91,53.97 U5.14 | IC6.28 R4.2 | v74.93,24.13 R4.2 | R4.2 v76.2,24.13 | JP10.5 88.9,46.99 R5.2 | v77.47,66.04 U2.20 | C5.1 41.91,86.36 11.43,86.36 C4.1 | U4.2 10.8,63.5 13.34,66.04 U4.14 C7.1 U6.28

## Text on the board
tPlace: 100nF | 100nF | Gigatron RAM & IO / Expansion & Video Repeater | Rev. 2 | adapter | 74377 | 100nF | 74113 | IDT720x | 74574 | SD-Card | 4 lines | /SS0 | GPB7 | 100nF | COM | 74113 | 2,2k | GND | 3,3V | MOSI | SCK | 3 lines | MISO0 | Port A 1=+5V 2..9=Bit0..7 10=GND | 1N4148 | 100nF | 7400 | 74244 | GAL2 | 10k | MCP23S17SP | 100nF | 10k | 100nF | Port B | 628128 | GAL1